# Altium PCB PCB1.PcbDoc
Units mm, origin at the board's own origin, x right, y up, seen from the top; angles counter-clockwise.
Board outline 152.4 x 101.6 mm, 2 copper layers (Top Layer, Bottom Layer); 48 components, 32 nets, 163 pads, 46 vias.
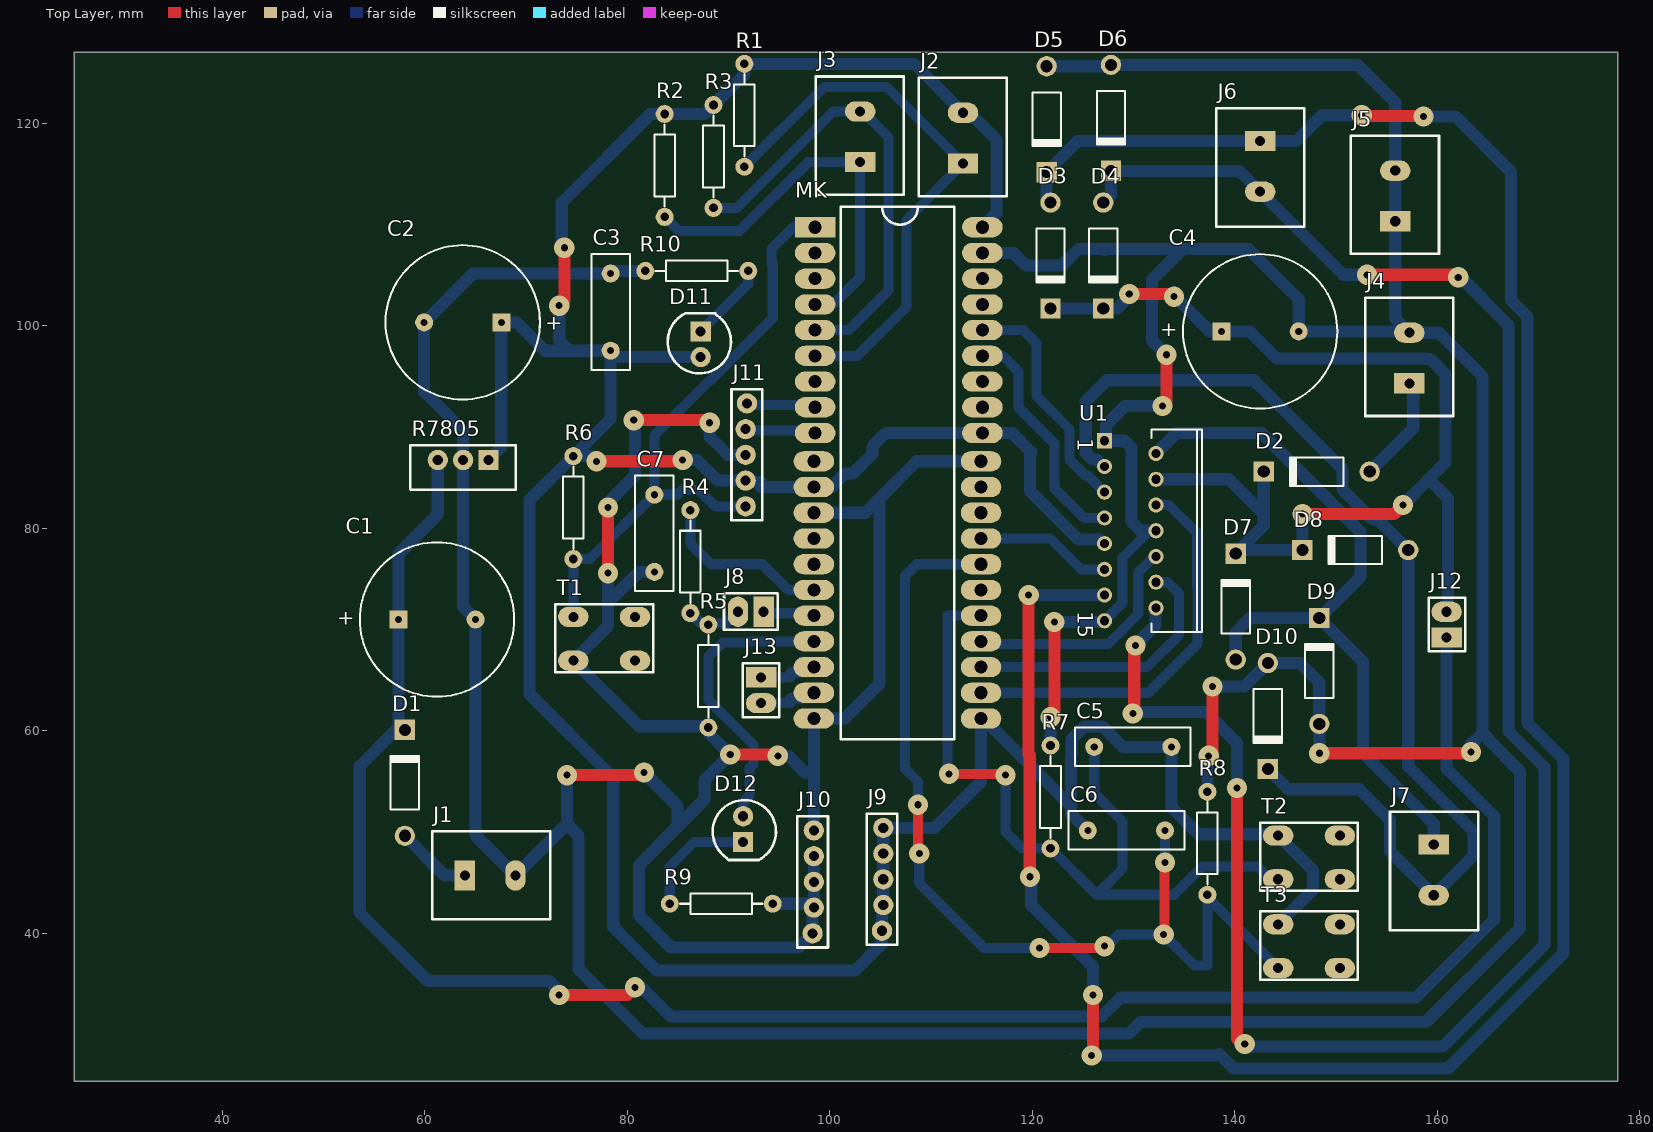
[diagram p0: Top Layer view]
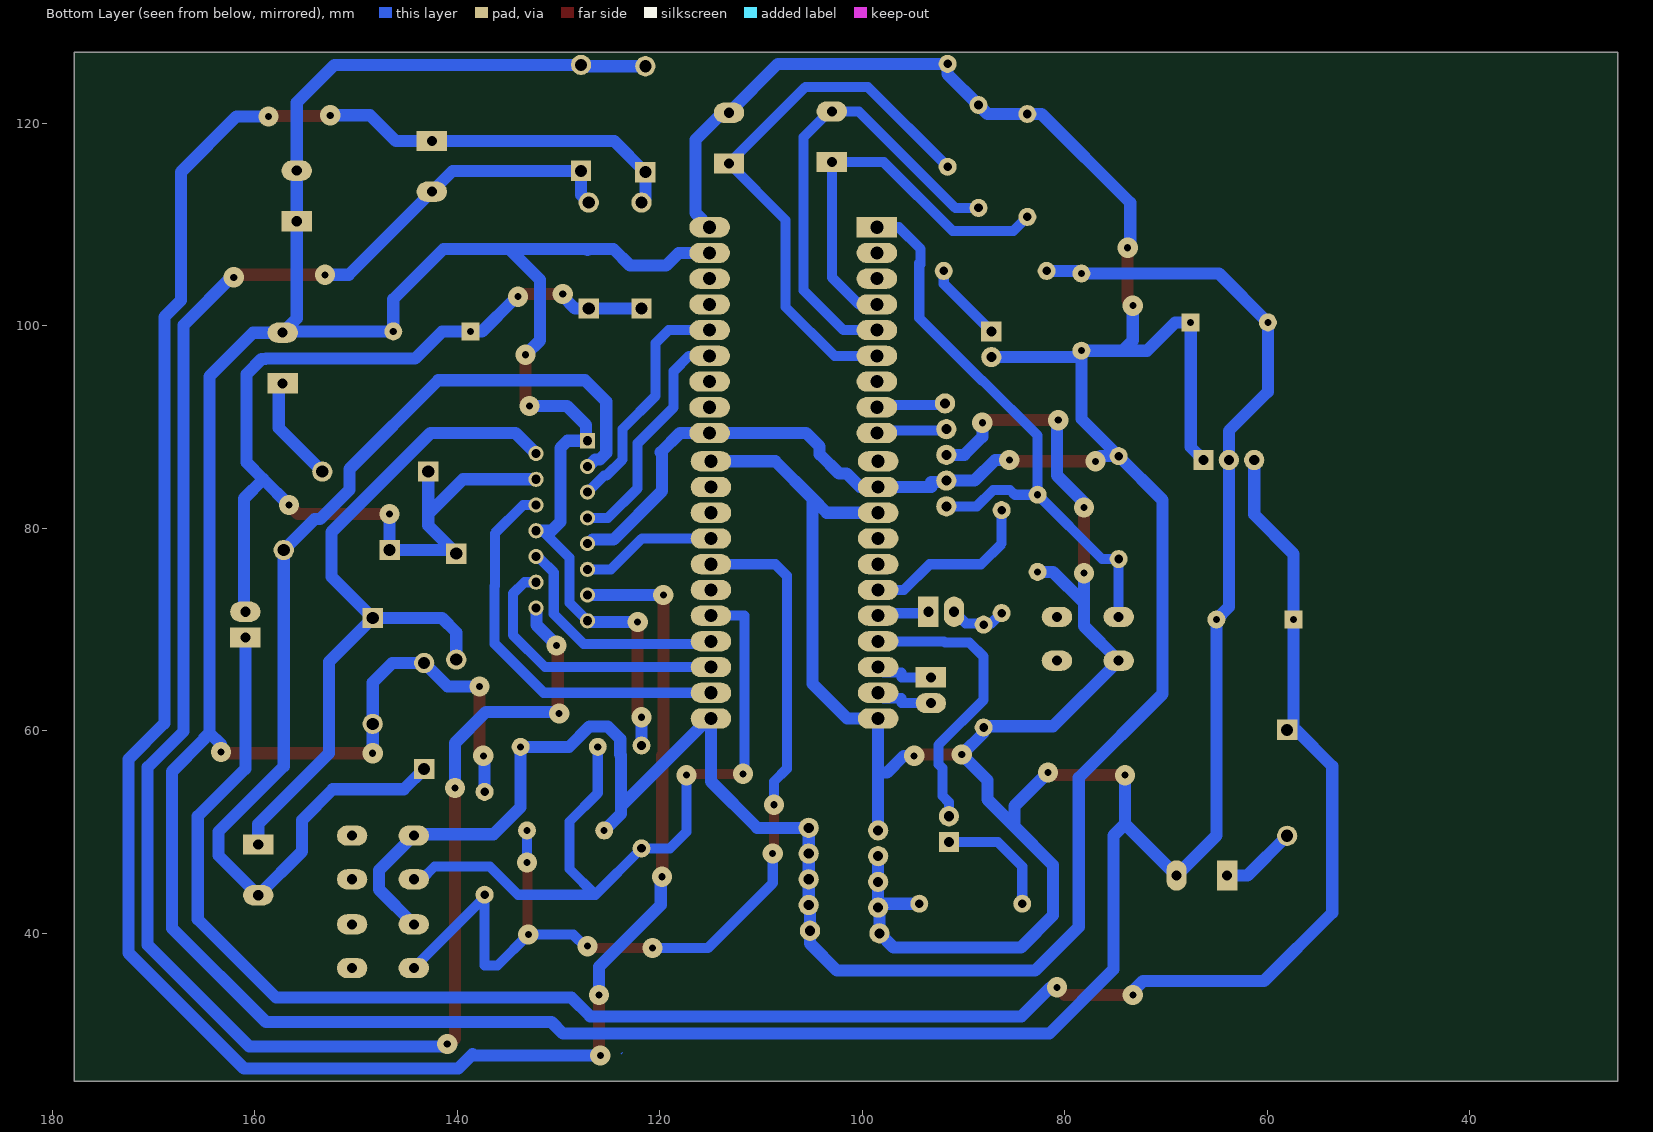
[diagram p1: Bottom Layer view, seen from below]

## Layer stack, top to bottom
Top Solder: solder mask 0.0102, Solder Resist, Dk 3.5
Top Layer: signal copper 0.0356
Dielectric 1: dielectric 0.32, FR-4, Dk 4.8
Bottom Layer: signal copper 0.0356
Bottom Solder: solder mask 0.0102, Solder Resist, Dk 3.5

## Board outline
25.4,25.4 177.8,25.4 177.8,127 25.4,127

## Design rules (kind name [scope] priority, off if disabled: settings)
Clearance [All] p1: gap=0.5 ignorepadtopadclearanceinfootprint=FALSE
PolygonConnect [All] p1: connectstyle=Relief reliefconductorwidth=0.254 reliefentries=4 polygonreliefangle="90 Angle" airgapwidth=0.254
RoutingVias [All] p1: holewidth=0.711 width=1.27 viastyle="Through Hole" minholewidth=0.711 minwidth=1.27 maxholewidth=0.711 maxwidth=1.27
SolderMaskExpansion [All] p1: expansion=0.102
Width Width_1 [InNetClass('debele')] p1: maxlimit=1.2 minlimit=1.2 preferedwidth=1.2
Width [InNetClass('All Nets')] p2: maxlimit=1 minlimit=1 preferedwidth=1
30 further rules are at their usual default settings.

## Classes and differential pairs
net class debele: GND NetC1_1 NetD1_1 NetD2_1 OUTPUT1 OUTPUT2 OUTPUT3 OUTPUT4 VCC_5V VCC_9V
component class Sheet1: C1 C2 C3 C4 C5 C6 C7 D1 D2 D3 D4 D5 D6 D7 D8 D9 D10 D11 D12 J8 J9 J10 J11 MK R1 R2 R3 R4 R5 R6 R8 R9 R10 R7805 T1 T2 T3 U1

## Components (designator, comment, footprint, x,y, rotation, side; value= is the part's Value field where it differs from the comment)
C1 "Cap Pol1" RB7.6-15 61.214,70.993 r180 top value=470uF
C2 "Cap Pol1" RB7.6-15 63.754,100.33 r0 top value=470u
C3 "Cap" RAD-0.3 78.359,101.346 r270 top value=100nF
C4 "Cap Pol1" RB7.6-15 142.494,99.441 r180 top value=470u
C5 "Cap" RAD-0.3 129.921,58.42 r0 top value=100n
C6 "Cap" RAD-0.3 129.286,50.165 r180 top value=100n
C7 "Cap" RAD-0.3 82.677,79.502 r90 top value=100n
D1 "Diode 1N4001" DO-41 58.039,54.864 r90 top
D2 "Diode 1N4001" DO-41 148.082,85.598 r180 top
D3 "Diode 1N4001" DO-41 121.793,106.934 r270 top
D4 "Diode 1N4001" DO-41 127,106.934 r270 top
D5 "Diode 1N4001" DO-41 121.412,120.396 r270 top
D6 "Diode 1N4001" DO-41 127.762,120.523 r270 top
D7 "Diode 1N4001" DO-41 140.081,72.263 r90 top
D8 "Diode 1N4001" DO-41 151.892,77.851 r180 top
D9 "Diode 1N4001" DO-41 148.336,65.913 r90 top
D10 "Diode 1N4001" DO-41 143.256,61.468 r270 top
D11 "LED_start" PCBComponent_1#1 87.249,96.901 r90 top
D12 "LED_blink" PCBComponent_1#1 91.44,51.562 r270 top
J1 "5mm_za_bateriju" PCBComponent_1#2 63.961,45.72 r90 top
J2 "5mm_za_enkoder" PCBComponent_1#2 113.157,116.031 r180 top
J3 "5mm_za_enkoder" PCBComponent_1#2 102.997,116.158 r180 top
J4 "5mm_za_bateriju" PCBComponent_1#2 157.226,94.314 r180 top
J5 "5mm_za_enkoder" PCBComponent_1#2 155.829,110.316 r180 top
J6 "5mm_za_motor" PCBComponent_1#2 142.494,118.237 r0 top
J7 "5mm_za_motor" PCBComponent_1#2 159.639,48.768 r0 top
J8 "2.54mm_za_Blutut" PCBComponent_1#3 93.472,71.755 r270 top
J9 "2.54mm_za_VDD" PCBComponent_1#4 105.283,50.419 r270 top
J10 "2.54mm_za_GND" PCBComponent_1#4 98.425,50.165 r270 top
J11 "2.54mm_za_programator" PCBComponent_1#4 91.694,82.169 r90 top
J12 "2.54mm" PCBComponent_1#3 160.909,69.215 r180 top
J13 "2.54mm_dodatni" PCBComponent_1#3 93.218,65.278 r0 top
MK "dsPIC30F4013" PCBComponent_1#5 98.552,109.728 r0 top
R1 "Res2" AXIAL-0.4 91.567,120.777 r90 top value=2k2
R2 "Res2" AXIAL-0.4 83.693,115.824 r90 top value=2k2
R3 "Res2" AXIAL-0.4 88.519,116.713 r90 top value=2k2
R4 "Res2" AXIAL-0.4 86.233,76.708 r90 top value=4k7
R5 "Res2" AXIAL-0.4 88.011,65.405 r90 top value=10k
R6 "Res2" AXIAL-0.4 74.676,82.042 r90 top value=10k
R7 "Res2" AXIAL-0.4 121.793,53.467 r270 top value=10k
R8 "Res2" AXIAL-0.4 137.287,48.895 r270 top value=10k
R9 "Res2" AXIAL-0.4 89.281,42.926 r180 top value=330
R10 "Res2" AXIAL-0.4 86.868,105.41 r0 top value=330
R7805 "Regulator 7805" PCBComponent_1#6 61.294,86.741 r0 top
T1 "TASTER" PCBComponent_1#7 80.772,66.929 r180 top
T2 "TASTER" PCBComponent_1#7 150.368,45.339 r180 top
T3 "TASTER" PCBComponent_1#7 150.368,36.576 r180 top
U1 "L298N" Multiwatt15V 129.667,79.756 r270 top

## Footprints (in the part's own frame and the unit in brackets; to place one, negate y for a bottom-side part, rotate by r counter-clockwise, add the part's x,y. Pads: shape width x height; smd on the part's side, far side on the other; paste and mask are expansions set on the pad)
AXIAL-0.4 [mil] "Axial Device, Thru-Hole; 2 Leads; 0.4 in Pin Spacing"
  round 70 hole 33.46: 1(-200,0) 2(200,0)
  silkscreen extent -160,-40 160,40
DO-41 [mm] "Diode, Axial; Body 5.2 x 2.7 mm (LxDia. max), Lead Dia. 0.86 mm (max)"
  round 2 hole 1.2: 1(-5.23,0)
  rect 2x2 hole 1.2: 2(5.23,0)
  silkscreen extent -2.65,-1.4 2.75,1.4
Multiwatt15V [mm] "TO, Thru-Hole, Vertical, Heatsink Mounted; 15 Bent Staggered Leads; Pitch 1.27 mm"
  rect 1.5x1.5 hole 0.9: 1(-8.89,-2.54)
  round 1.5 hole 0.9: 2(-7.62,2.54) 3(-6.35,-2.54) 4(-5.08,2.54) 5(-3.81,-2.54) 6(-2.54,2.54) 7(-1.27,-2.54) 8(0,2.54) 9(1.27,-2.54) 10(2.54,2.54) 11(3.81,-2.54) 12(5.08,2.54) 13(6.35,-2.54) 14(7.62,2.54) 15(8.89,-2.54)
  silkscreen extent -10,2.09 10,7.09
PCBComponent_1#1 [mm]
  round 2 hole 1: 1(0,0)
  rect 2x2 hole 1: 2(2.54,0)
  silkscreen extent -1.6,-3 4.32,3.25
PCBComponent_1#2 [mm]
  rect 3x2 hole 1: 1(0,0)
  oval 3x2 hole 1: 2(0,-5)
  silkscreen extent -4.33,-8.45 4.38,3.22
PCBComponent_1#3 [mm]
  rect 3x2 hole 1: 1(0,0)
  oval 3x2 hole 1: 2(0,-2.54)
  silkscreen extent -1.83,-3.92 1.78,1.38
PCBComponent_1#4 [mm]
  round 2 hole 1: 1(0,0) 2(2.54,0) 3(5.08,0) 4(7.62,0) 5(10.16,-0.127)
  silkscreen extent -1.4,-1.65 11.56,1.4
PCBComponent_1#5 [mm]
  rect 4x2 hole 1.3: 1(0,0)
  oval 4x2 hole 1.3: 2(0,-2.54) 3(0,-5.08) 4(0,-7.62) 5(0,-10.16) 6(0,-12.7) 7(0,-15.24) 8(0,-17.78) 9(0,-20.32) 10(-0.127,-23.114) 11(-0.127,-25.654) 12(-0.127,-28.194) 13(-0.127,-30.734) 14(-0.127,-33.274) 15(-0.127,-35.814) 16(-0.127,-38.354) 17(-0.127,-40.894) 18(-0.127,-43.434) 19(-0.127,-45.974) 20(-0.127,-48.514) 21(16.383,-48.514) 22(16.383,-45.974) 23(16.383,-43.434) 24(16.383,-40.894) 25(16.383,-38.354) 26(16.383,-35.814) 27(16.383,-33.274) 28(16.383,-30.734) 29(16.383,-28.194) 30(16.383,-25.654) 31(16.383,-23.114) 32(16.51,-20.32) 33(16.51,-17.78) 34(16.51,-15.24) 35(16.51,-12.7) 36(16.51,-10.16) 37(16.51,-7.62) 38(16.51,-5.08) 39(16.51,-2.54) 40(16.51,0)
  silkscreen extent 2.54,-50.55 13.72,2.03
PCBComponent_1#6 [mm]
  round 2 hole 1: 1(0,0) 2(2.5,0)
  rect 2x2 hole 1: 3(5,0)
  silkscreen extent -2.7,-2.93 7.7,1.45
PCBComponent_1#7 [mm]
  oval 3x2 hole 1: 1(6.096,0) 2(6.096,-4.318) ""(0,0) ""(0,-4.318)
  silkscreen extent -1.78,-5.59 7.87,1.14
RAD-0.3 [mil] "Radial Cap, Thru-Hole; 2 Leads; 0.3 in Pin Spacing"
  round 70 hole 27.56: 1(-150,0) 2(150,0)
  silkscreen extent -225,-75 225,75
RB7.6-15 [mil] "Polarized Capacitor (Radial); 2 Leads"
  rect 70x70 hole 27.56: 1(150,0)
  round 70 hole 27.56: 2(-150,0)
  silkscreen extent -300,-300 300,300

## Part data
C1 C2 C4: "Polarized Capacitor (Radial)", LatestRevisionDate=17-Jul-2002, LatestRevisionNote="Re-released for DXP Platform.", PackageDescription="Polarized Capacitor (Radial); 2 Leads", PackageReference=RB7.6-15, Published=8-Jun-2000, Publisher="Altium Limited"
C3 C5 C6 C7: "Capacitor", LatestRevisionDate=17-Jul-2002, LatestRevisionNote="Re-released for DXP Platform.", PackageDescription="Radial Cap, Thru-Hole; 2 Leads; 0.3 in Pin Spacing", PackageReference=RAD-0.3, Published=8-Jun-2000, Publisher="Altium Limited"
D1 D2 D3 D4 D5 D6 D7 D8 D9 D10: "1 Amp General Purpose Rectifier", Code_JEDEC=DO-204-AL, ComponentLink1Description="Manufacturer Link", ComponentLink1URL=http://www.fairchildsemi.com/, ComponentLink2Description=Datasheet, ComponentLink2URL=http://www.fairchildsemi.com/ds/1N%2F1N4001.pdf, DatasheetVersion=1998, LatestRevisionDate=17-Jul-2002, LatestRevisionNote="Re-released for DXP Platform.", PackageDescription="Diode, Axial; Body 5.2 x 2.7 mm (LxDia. max), Lead Dia. 0.86 mm (max)", PackageReference=DO-41, PackageVersion=Aug-1999, Published=8-Jun-2000, Publisher="Altium Limited"
D11 D12 J1 J2 J3 J4 J5 J6 J7 J8 J9 J10 J11 J12 J13 MK R7805 T1 T2 T3: library part Component_1
R1 R2 R3 R4 R5 R6 R7 R8 R9 R10: "Resistor", LatestRevisionDate=17-Jul-2002, LatestRevisionNote="Re-released for DXP Platform.", PackageDescription="Axial Device, Thru-Hole; 2 Leads; 0.4 in Pin Spacing", PackageReference=AXIAL-0.4, Published=8-Jun-2000, Publisher="Altium Limited"
U1: "Dual Full Bridge Driver", ComponentLink1Description="Manufacturer Link", ComponentLink1URL=http://www.st.com/, ComponentLink2Description=Datasheet, ComponentLink2URL=http://www.st.com/stonline/products/literature/ds/1773/l298.pdf, DatasheetVersion=Jul-1999, LatestRevisionDate=14-May-2007, LatestRevisionNote="Mapped to vertical PCB.", PackageDescription="TO, Thru-Hole, Vertical, Heatsink Mounted; 15 Bent Staggered Leads; Pitch 1.27 mm", PackageReference=Multiwatt15V, Published=8-Jun-2000, Publisher="Altium Limited"

## Via types
v1: diameter 2, hole 0.7, Top Layer to Bottom Layer, 46 vias

## Nets (pads, with @x,y where several pads share a name; then routed paths per layer and width w, separated by ;. In a path a pad name is that pad's centre, name@x,y a point inside that pad or via, vN(x,y) a via of type N, cw(c..) or ccw(c..) an arc to the next point about the centre after c; other vN are vias at no path point)
DODATNI1: J13.1 MK.18 | length 5.9
  Bottom Layer w1: J13.1 96.121,65.278 96.121,65.754 97.885,65.754 MK.18
DODATNI2: J13.2 MK.19 | length 5.9
  Bottom Layer w1: J13.2 96.121,62.738 96.121,63.214 97.885,63.214 MK.19
ENA: MK.22 U1.6 | length 39.8
  Bottom Layer w1: MK.22@115.175,63.994 MK.22 131.445,63.754 136.293,68.602 136.293,74.279 136.271,74.301 136.271,79.502 133.477,82.296 132.354,82.296 U1.6@132.281,82.37
ENB: MK.28 U1.11 | length 13.2
  Bottom Layer w1: MK.28 121.753,78.994 124.801,75.946 U1.11@126.896,75.946
GND: C1.2 C2.2 C3.1 C4.2 C7.1 D5.1 D6.1 D9.1 D10.1 J1.2 J4.2 J5.1 J5.2 J10.1 J10.2 J10.3 J10.4 J10.5 J11.3 MK.12 MK.20 MK.31 MK.39 R5.1 R7.1 R8.1 R9.1 R10.1 R7805.2 T1.1 U1.1 U1.8 U1.15 | length 690.4
  Top Layer w1.2: v1(74.041,55.626) 81.407,55.626 v1(81.661,55.88) ; v1(78.105,75.565) v1(78.105,82.042) ; v1(80.645,90.678) 87.884,90.678 v1(88.138,90.424) ; v1(90.17,57.658) 94.742,57.658 v1(94.869,57.531) ; v1(121.793,61.341) 122.174,61.722 v1(122.174,70.739) ; v1(132.842,92.075) 133.246,92.479 v1(133.246,97.132) ; v1(137.414,57.531) 137.795,57.912 v1(137.795,64.389) ; v1(148.336,57.785) 163.195,57.785 v1(163.322,57.912)
  Bottom Layer w0: R8.1 R8.1@137.414,54.102
  Bottom Layer w1: U1.15 128.905,72.644 128.905,77.089 U1.8@131.572,79.756
  Bottom Layer w1.2: v1@74.041,55.372 74.041,50.8 ; v1(78.105,75.565) 78.105,72.644 ; v1(78.105,82.042) 78.105,82.55 80.772,85.217 v1@80.772,90.678 ; v1(81.661,55.88) 84.963,52.578 84.963,50.546 ; R10.1 78.613,105.41 C3.1 64.77,105.156 C2.2 59.944,93.472 63.794,89.622 R7805.2 63.794,72.223 C1.2 65.024,49.657 J1.2 74.041,50.8 ; C7.1 81.153,75.692 78.105,72.644 ; v1@88.138,90.17 88.138,89.027 89.916,87.249 J11.3 J11.3@91.554,87.389 ; R9.1 98.044,42.926 J10.4 ; v1(94.869,57.531) 95.885,57.531 97.536,55.88 98.425,55.88 ; J10.2 J10.3 J10.4 ; J10.1 98.425,55.88 ; MK.12 103.505,81.534 104.902,82.931 ; MK.31 108.585,86.614 104.902,82.931 ; MK.39 118.11,107.188 119.357,105.941 122.936,105.941 124.587,107.592 127,107.592 127.127,107.465 127.254,107.592 134.874,107.592 ; D5.1 127.635,125.626 D6.1 152.123,125.753 155.829,122.047 J5.2 J5.1 155.829,100.711 J4.2@157.099,99.441 ; R7.1 v1(121.793,61.341) ; v1(122.174,70.739) 126.98,70.739 U1.15@127.117,70.876 ; U1.8 131.572,79.756 130.683,79.756 129.794,80.645 129.794,87.943 129.091,88.646 U1.1 127.277,88.796 127.277,90.193 129.159,92.075 v1(132.842,92.075) ; v1(133.246,97.132) 131.826,98.552 131.826,104.544 134.874,107.592 ; R8.1 v1@137.287,57.277 ; v1(137.795,64.389) 140.947,64.389 D10.1 146.408,66.698 148.336,64.77 D9.1 v1(148.336,57.785) v1@148.336,57.658 ; v1(163.322,57.912) 163.322,58.674 164.465,59.817 ; 74.041,50.8 75.184,49.657 75.184,36.449 81.534,30.099 129.54,30.099 130.683,31.242 158.877,31.242 168.148,40.513 168.148,55.993 165.005,59.136 165.005,59.277 164.465,59.817 ; 78.105,72.644 78.105,70.358 T1.1 81.153,60.452 87.884,60.452 R5.1 88.011,59.817 v1(90.17,57.658) 87.63,55.118 87.63,53.213 84.963,50.546 ; 84.963,50.546 81.153,46.736 81.153,41.783 84.328,38.608 96.901,38.608 J10.5 98.298,42.418 J10.4 ; 98.425,55.88 MK.20 101.473,61.214 104.902,64.643 104.902,82.931 ; 134.874,107.592 141.328,107.592 146.304,102.616 C4.2 J4.2@157.099,99.441 ; J4.2@157.099,99.441 J4.2 160.147,99.314 164.465,94.996 164.465,59.817
INPUT1: MK.36 U1.5 | length 23.5
  Bottom Layer w1: MK.36 119.126,99.568 120.396,98.298 120.396,93.091 123.677,89.81 123.677,86.778 125.259,85.196 125.497,85.196 U1.5
INPUT2: MK.35 U1.7 | length 23.4
  Bottom Layer w1: MK.35 117.094,97.028 118.618,95.504 118.618,91.948 122.174,88.392 122.174,83.947 125.095,81.026 U1.7
INPUT3: MK.24 U1.10 | length 23.4
  Bottom Layer w1: MK.24 115.189,68.58 127.508,68.58 130.457,71.529 130.457,75.646 131.777,76.966 131.822,76.966 132.072,77.216 U1.10
INPUT4: MK.23 U1.12 | length 27.9
  Bottom Layer w1: MK.23@115.046,66.405 MK.23 131.318,66.294 134.493,69.469 134.493,73.533 133.35,74.676 U1.12
KanalA: J3.1 MK.4 R2.1 | length 39.6
  Bottom Layer w1: R2.1 85.09,109.347 91.059,109.347 97.87,116.158 J3.1 102.997,104.775 100.33,102.108 MK.4
KanalB: J3.2 MK.5 R3.1 | length 46.3
  Bottom Layer w1: R3.1 90.805,111.633 100.33,121.158 J3.2 103.251,121.158 105.791,118.618 105.791,103.505 101.854,99.568 MK.5
KanalZ: J2.1 MK.6 R1.1 | length 55.5
  Bottom Layer w1: R1.1 99.441,123.571 105.617,123.571 J2.1 107.569,110.443 107.569,101.854 102.743,97.028 MK.6
LED: D12.1 MK.17 | length 29.1
  Bottom Layer w1: D12.1 91.44,52.959 92.075,53.594 92.075,56.31 92.47,56.705 92.47,58.611 88.011,63.07 88.011,67.31 89.408,68.707 91.821,68.707 91.948,68.834 MK.17
MCLR: C7.2 J11.1 MK.1 R6.1 T1.2 | length 60.9
  Bottom Layer w1: T1.2 R6.1 76.327,76.962 C7.2 ; J11.1 88.68,82.169 87.061,83.788 85.405,83.788 84.929,83.312 C7.2 ; MK.1 96.393,109.728 94.234,107.569 94.234,106.045 94.361,106.172 94.361,100.76 88.202,94.601 88.124,94.601 82.677,89.154 C7.2
MOD_BRZINA: C6.1 MK.27 R8.2 T3.1 | length 98.6
  Top Layer w1: v1(108.712,52.705) 108.712,48.006 v1(108.839,47.879) ; v1(120.713,38.544) 126.936,38.544 v1(127.127,38.735) ; v1(132.969,39.878) 133.032,39.941 133.032,46.926 v1(133.096,46.99)
  Bottom Layer w1: v1@108.712,53.086 108.712,54.991 107.442,56.261 107.442,75.311 108.585,76.454 MK.27 ; v1(108.839,47.879) 108.839,44.958 115.252,38.544 v1(120.713,38.544) ; v1(127.127,38.735) 127.381,38.735 128.524,39.878 v1(132.969,39.878) 136.017,36.83 137.287,36.83 R8.2@137.287,43.561 ; v1(133.096,46.99) C6.1 ; R8.2 R8.2@137.287,43.561 ; T3.1 R8.2@137.287,43.561
MOD_POZICIJA: C5.1 MK.25 R7.2 T2.1 | length 78
  Top Layer w1: v1(111.76,55.753) 117.221,55.753 v1(117.348,55.626)
  Bottom Layer w1: v1@111.633,55.88 111.633,71.374 MK.25 ; v1(117.348,55.626) 117.348,50.038 118.999,48.387 R7.2 126.365,43.815 ; C5.1 126.111,53.848 128.905,51.054 128.905,46.355 126.365,43.815 ; T2.1 143.501,45.339 142.231,46.609 136.779,46.609 133.985,43.815 126.365,43.815
NetC1_1: C1.1 D1.2 J12.1 R7805.1 | length 199.1
  Top Layer w1.2: v1(73.279,33.909) 80.01,33.909 v1(80.772,34.671)
  Bottom Layer w1.2: R7805.1 61.294,81.36 57.404,77.47 C1.1 57.404,60.729 D1.2 57.173,60.094 53.594,56.515 53.594,42.037 60.325,35.306 72.263,35.306 v1@73.406,34.163 ; v1@81.28,34.671 81.407,34.671 84.269,31.809 126.854,31.809 128.7,33.655 157.861,33.655 165.608,41.402 165.608,51.562 160.909,56.261 J12.1
NetD1_1: D1.1 J1.1 | length 7.5
  Bottom Layer w1.2: D1.1 61.953,45.72 J1.1
NetD2_1: D2.1 J4.1 | length 10.7
  Bottom Layer w1.2: D2.1 157.607,89.893 157.607,93.933 J4.1
NetD11_2: D11.2 R10.2 | length 7.9
  Bottom Layer w1: D11.2 91.948,104.14 R10.2
NetD12_2: D12.2 R9.2 | length 11.9
  Bottom Layer w1: R9.2 84.201,46.609 86.614,49.022 D12.2
NetJ8_2: J8.2 R4.1 R5.2 | length 5.6
  Bottom Layer w1: R4.1 87.249,70.612 89.789,70.612 J8.2
OUTPUT1: D7.1 D9.2 J7.1 U1.2 | length 73.8
  Bottom Layer w1.2: U1.2 134.239,89.408 142.621,89.408 152.4,79.629 152.4,75.207 D9.2 ; D7.1 140.081,69.723 141.501,71.143 D9.2 ; J7.1 159.639,50.8 152.654,57.785 152.654,66.825 D9.2
OUTPUT2: D8.1 D10.2 J7.2 U1.3 | length 110.1
  Bottom Layer w1.2: U1.3 127.046,86.106 126.356,86.796 125.921,86.796 125.277,87.44 125.277,92.511 127.381,94.615 141.859,94.615 150.622,85.852 150.622,83.811 153.526,80.908 154.065,80.908 D8.1 157.122,56.492 163.576,50.038 163.576,47.705 J7.2 155.321,48.086 155.321,51.181 152.273,54.229 145.265,54.229 D10.2
OUTPUT3: D3.1 D5.2 J6.1 U1.13 | length 240.7
  Top Layer w1.2: v1(119.634,73.406) 119.634,57.668 119.748,57.554 119.748,45.606 v1(119.761,45.593) ; v1(125.857,27.94) 125.984,28.067 v1(125.984,33.909) ; v1(152.527,120.777) 152.59,120.713 158.559,120.713 v1(158.623,120.65)
  Bottom Layer w0: U1.13@126.778,73.406 U1.13@126.778,73.755
  Bottom Layer w1.2: v1(119.634,73.406) 126.778,73.406 U1.13@126.988,73.406 ; v1(119.761,45.593) 119.894,45.46 119.894,42.793 125.984,36.703 v1(125.984,33.909) ; D3.1 121.412,112.545 D5.2 124.483,118.237 J6.1 146.05,118.237 148.59,120.777 v1(152.527,120.777) ; v1(125.857,27.94) 138.352,27.94 138.479,28.067 139.89,26.656 161.042,26.656 172.456,38.07 172.456,57.2 168.905,60.751 168.905,100.863 167.259,102.509 167.259,115.189 161.798,120.65 v1(158.623,120.65)
OUTPUT4: D4.1 D6.2 J6.2 U1.14 | length 198.4
  Top Layer w1.2: v1(129.921,61.722) 130.057,61.858 130.057,68.3 v1(130.192,68.436) ; v1(140.208,54.356) 140.208,29.591 140.716,29.083 v1(140.97,29.083) ; v1(153.035,105.029) 161.798,105.029 v1(162.052,104.775)
  Bottom Layer w1.2: D4.1 127.762,112.926 D6.2 140.438,115.293 J6.2 150.702,105.029 v1(153.035,105.029) ; v1(129.921,61.722) 130.048,61.849 137.16,61.849 140.208,58.801 v1(140.208,54.356) ; v1(130.192,68.436) 130.192,68.481 132.15,70.438 132.15,72.079 U1.14 ; v1@141.097,28.829 160.528,28.829 170.556,38.857 170.556,56.413 167.005,59.964 167.005,100.076 v1@162.179,104.902
PGC: J11.5 MK.8 | length 7.3
  Bottom Layer w1: J11.5 91.821,92.188 98.312,92.188 MK.8 MK.8@98.298,91.694
PGD: J11.4 MK.9 | length 7.5
  Bottom Layer w1: J11.4 91.694,89.648 98.312,89.648 MK.9 MK.9@98.298,89.154
RXD: J8.1 MK.16 | length 5.2
  Bottom Layer w1: J8.1 93.472,71.614 98.185,71.614 MK.16
TXD: MK.15 R4.2 | length 17.7
  Bottom Layer w1: R4.2 86.233,78.486 88.265,76.454 93.345,76.454 95.885,73.914 MK.15 MK.15@98.185,74.154
VCC_5V: C2.1 C3.2 C5.2 C6.2 D11.1 J2.2 J9.1 J9.2 J9.3 J9.4 J9.5 J11.2 MK.11 MK.21 MK.32 MK.40 R1.2 R2.2 R3.2 R6.2 R7805.3 T2.2 T3.2 U1.9 | length 359.7
  Top Layer w1.2: v1(73.279,101.981) 73.787,102.489 v1(73.787,107.696) ; v1(76.962,86.614) 85.09,86.614 85.344,86.868 v1(85.471,86.741)
  Bottom Layer w1.2: R7805.3 67.564,88.011 C2.1 69.088,100.33 71.882,97.536 74.295,97.536 ; v1(73.279,101.981) 73.279,98.552 74.295,97.536 ; v1@73.533,107.823 73.533,112.141 82.296,120.904 R2.2 87.63,120.904 R3.2 91.567,124.841 R1.2 108.331,125.857 J2.2 113.792,121.031 116.459,118.364 116.459,111.125 MK.40 ; v1(76.962,86.614) 76.454,87.122 R6.2 ; v1@85.725,86.741 86.868,86.741 88.9,84.709 J11.2 91.834,84.569 93.183,84.569 93.183,84.074 MK.11 100.203,84.074 101.536,85.407 102.298,85.407 104.203,87.312 104.203,88.075 105.537,89.408 MK.32 117.983,89.408 119.888,87.503 119.761,87.376 119.761,83.673 124.558,78.876 U1.9@126.619,78.876 ; D11.1 78.994,96.901 C3.2 ; C6.2 123.825,51.816 123.825,52.543 ; T3.2 147.701,44.323 147.701,46.228 T2.2 144.145,49.784 136.398,49.784 133.731,52.451 C5.2 128.939,58.42 126.939,60.42 125.131,60.42 123.893,59.182 123.893,57.677 123.825,57.609 123.825,52.543 ; 74.295,97.536 C3.2 ; R6.2 70.358,82.804 70.358,63.627 78.613,55.372 78.613,40.64 82.931,36.322 102.489,36.322 105.156,38.989 J9.5 105.156,42.672 J9.4 J9.3 J9.2 J9.1 110.363,50.419 114.935,54.991 MK.21 115.154,61.214 123.825,52.543 ; R6.2 78.359,90.805 C3.2
VCC_9V: C4.1 D2.2 D3.2 D4.2 D7.2 D8.2 J12.2 U1.4 | length 112.5
  Top Layer w1.2: v1(129.572,103.124) 133.731,103.124 v1(133.985,102.87) ; v1(146.685,81.407) 155.702,81.407 v1(156.591,82.296)
  Bottom Layer w1.2: D3.2 D4.2 128.374,101.704 129.572,102.902 v1(129.572,103.124) ; U1.4 139.423,84.836 142.852,81.407 ; v1@134.366,102.616 137.541,99.441 C4.1 141.478,99.441 144.145,96.774 158.877,96.774 158.937,96.714 159.306,96.714 160.782,95.238 160.782,86.487 159.131,84.836 ; D7.2 D7.2@140.439,77.851 ; D2.2 142.852,81.407 ; v1(146.685,81.407) 146.662,81.384 D8.2 D7.2@140.439,77.851 ; v1(156.591,82.296) 159.131,84.836 ; J12.2 161.036,71.882 161.036,82.931 159.131,84.836 ; D7.2@140.439,77.851 142.852,80.264 142.852,81.407
pads on no net: MK.2 MK.3 MK.7 MK.10 MK.13 MK.14 MK.26 MK.29 MK.30 MK.33 MK.34 MK.37 MK.38 T1. T2. T3.
copper on no net: | length 0.2
  Bottom Layer w0: 123.698,28.194 123.825,28.067

## Text inside footprints (layer, text, board x,y; h text height)
C1: Top Overlay "+" at 53.082,71.73 h1.5 r180
C2: Top Overlay "+" at 71.886,99.593 h1.5
C4: Top Overlay "+" at 134.362,100.178 h1.5 r180
U1: Top Overlay "15" at 124.502,71.816 h1.5 r270; Top Overlay "1" at 124.502,88.876 h1.5 r270